# Altium PCB PCB1.PcbDoc
Units mil, origin at the board's own origin, x right, y up, seen from the top; angles counter-clockwise.
Board outline 1929.28 x 901.79 mil, 2 copper layers (Top Layer, Bottom Layer); 17 components, 17 nets, 58 pads, 16 vias.
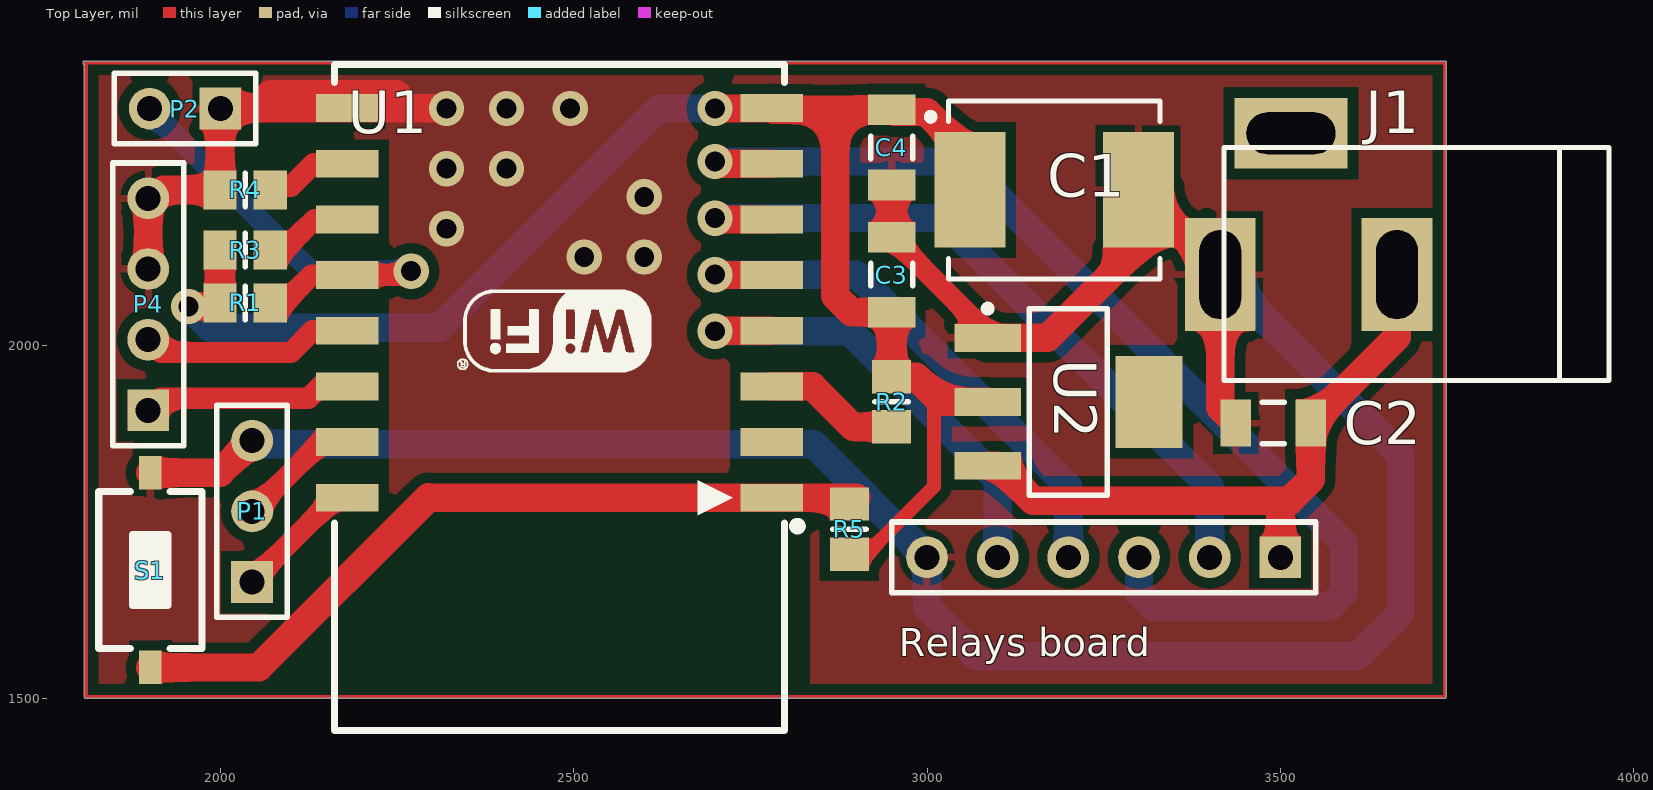
[diagram p0: Top Layer view]
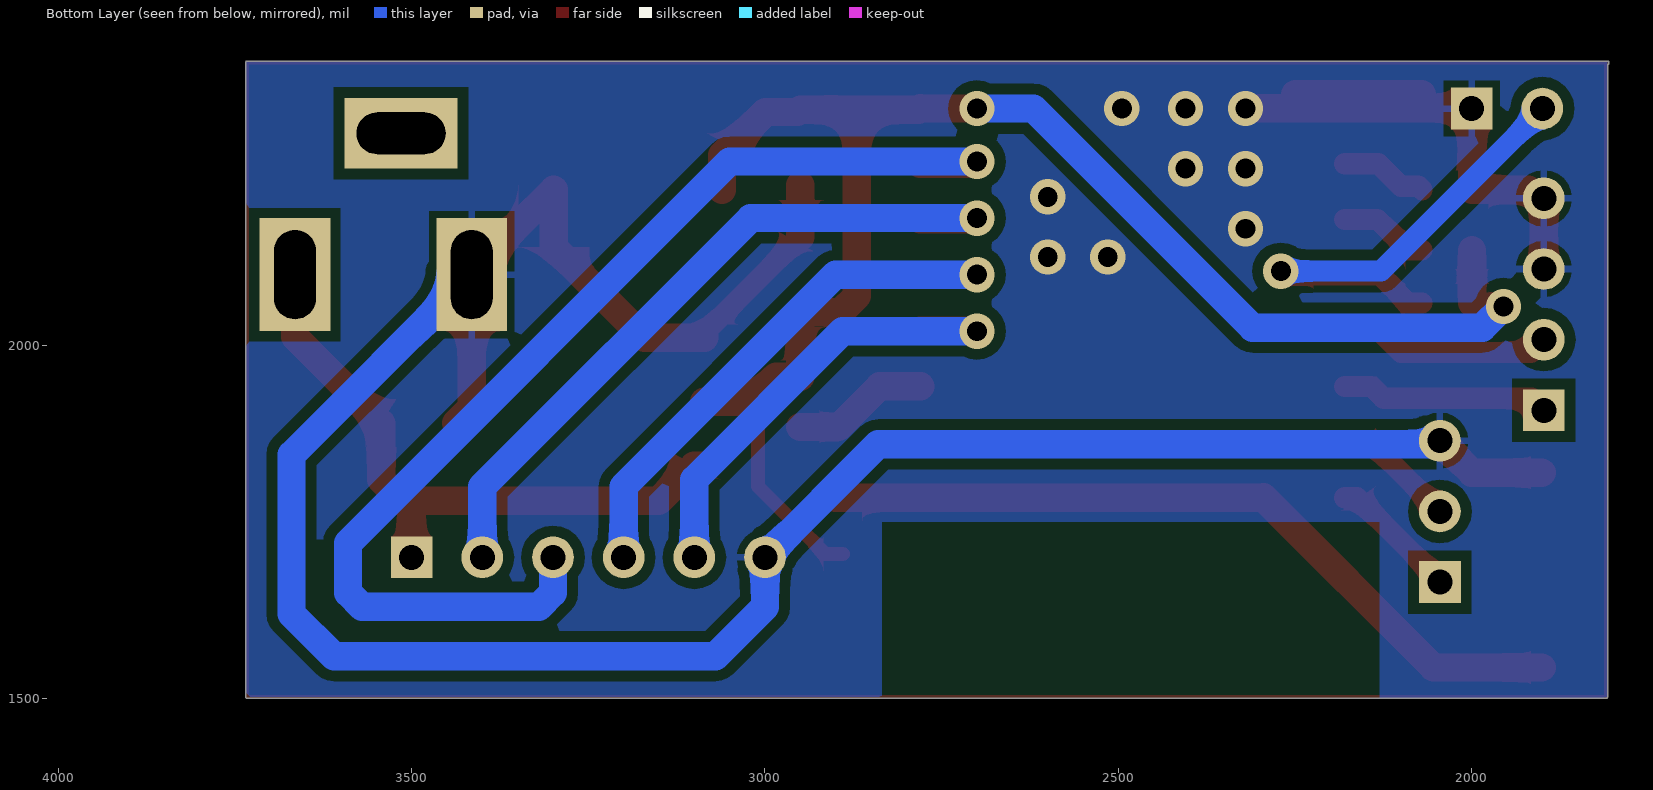
[diagram p1: Bottom Layer view, seen from below]

## Layer stack, top to bottom
Top Solder: solder mask 0.4, Solder Resist, Dk 3.5
Top Layer: signal copper 1.4
Dielectric 1: dielectric 12.6, FR-4, Dk 4.8
Bottom Layer: signal copper 1.4
Bottom Solder: solder mask 0.4, Solder Resist, Dk 3.5

## Board outline
1807.48,1503 1807.48,2397.36 cw(c1808.24,2399.76) 1808.24,2402.27 3732.5,2402.27 cw(c3732.5,2399.76) 3735.01,2399.76 3735.01,1503 cw(c3732.5,1503) 3732.5,1500.48 1810,1500.48 cw(c1810,1503)

## Design rules (kind name [scope] priority, off if disabled: settings)
Clearance [All] p1: gap=15
PolygonConnect [All] p1: connectstyle=Relief reliefconductorwidth=10 reliefentries=4 polygonreliefangle="90 Angle" airgapwidth=10
RoutingVias [All] p1: holewidth=28 width=50 viastyle="Through Hole" minholewidth=28 minwidth=50 maxholewidth=28 maxwidth=50
SolderMaskExpansion [All] p1: expansion=4
Width [All] p1: maxlimit=50 minlimit=1 preferedwidth=20
30 further rules are at their usual default settings.

## Classes and differential pairs
component class Schematic: C1 C2 C3 C4 J1 P1 P2 P4 R1 R2 R4 R5 "Relays board" S1 U1 U2

## Components (designator, comment, footprint, x,y, rotation, side; value= is the part's Value field where it differs from the comment)
C1 "T495E477K010ATE040" 7260-38 3180,2220 r0 top
C2 "Cap Semi" C1206 3490,1890 r0 top
C3 "Cap Semi" C1206 2950,2100 r270 top
C4 "Cap Semi" C1206 2950,2280 r90 top
J1 "PWR2.5" Jack-DC 3540,2200 r180 top
P1 "UART" HDR1X3 2045,1665 r90 top
P2 "flash" HDR1X2 2000,2335 r180 top
P4 "Header 4" HDR1X4 1898,1908 r90 top
R1 "Res1" 6-0805_N 2035,2060 r180 top
R2 "Res1" 6-0805_N 2950,1920 r90 top
R3 "Res1" 6-0805_N 2035,2135 r0 top
R4 "Res1" 6-0805_N 2035,2220 r0 top
R5 "Res1" 6-0805_N 2890,1740 r270 top
"Relays board" "Header 6" HDR1X6 3500,1700 r180 top (schematic designator P3)
S1 "SW-PB" SW-SMD 1901,1682 r270 top
U1 "ESP8266 ESP_7" "ESP8266 ESP_12" 2480,2060 r180 top
U2 "LM1117-3.3V" SOT223-4N 3200,1920 r0 top

## Footprints (in the part's own frame and the unit in brackets; to place one, negate y for a bottom-side part, rotate by r counter-clockwise, add the part's x,y. Pads: shape width x height; smd on the part's side, far side on the other; paste and mask are expansions set on the pad)
6-0805_N [mm] "Chip Resistor, Body 2.0x1.2mm, IPC Medium Density"
  rect 1.2x1.4 smd: 1(-0.9,0) 2(0.9,0)
  silkscreen extent 0,-0.6 0,0.6, body extent -1.07,-0.7 1.07,0.7, height 0.7
7260-38 [mm] "Medium density IPC, based on Kemet T495 series dimension data"
  rect 2.55x4.15 smd: 1(-3.025,0) 2(3.025,0)
  silkscreen extent -4.56,-3.2 3.8,3.2, body extent -3.8,-3.15 3.8,3.15, height 3.8
C1206 [mm] "Chip Capacitor, Body 3.2x1.6mm, IPC High Density"
  rect 1.1x1.7 smd: 1(-1.35,0) 2(1.35,0)
  silkscreen extent -0.4,-0.75 0.4,0.75, body extent -1.7,-0.9 1.7,0.9, height 1.3
"ESP8266 ESP_12" [mm] "ESP8266 ESP-12"
  rect 2.25x1 smd: 1(-7.625,7) 2(-7.625,5) 3(-7.625,3) 4(-7.625,1) 5(-7.625,-1) 6(-7.625,-3) 7(-7.625,-5) 8(-7.625,-7) 9(7.625,-7) 10(7.625,-5) 11(7.625,-3) 12(7.625,-1) 13(7.625,1) 14(7.625,3) 15(7.625,5) 16(7.625,7)
  silkscreen extent -8.7,-8.57 8.08,15.37, body extent -7.86,-8.52 8.16,15.51, height 3.82
HDR1X2 [mm] "Connector; Header; 2 Position"
  rect 1.5x1.5 hole 0.9: 1(0,0)
  round 1.5 hole 0.9: 2(2.54,0)
  silkscreen extent -1.27,-1.27 3.81,1.27
HDR1X3 [mm] "Connector; Header; 3 Position"
  rect 1.5x1.5 hole 0.9: 1(0,0)
  round 1.5 hole 0.9: 2(2.54,0) 3(5.08,0)
  silkscreen extent -1.27,-1.27 6.35,1.27
HDR1X4 [mm] "Connector; Header; 4 Position"
  rect 1.5x1.5 hole 0.9: 1(0,0)
  round 1.5 hole 0.9: 2(2.54,0) 3(5.08,0) 4(7.62,0)
  silkscreen extent -1.27,-1.27 8.89,1.27
HDR1X6 [mm] "Connector; Header; 6 Position"
  rect 1.5x1.5 hole 0.9: 1(0,0)
  round 1.5 hole 0.9: 2(2.54,0) 3(5.08,0) 4(7.62,0) 5(10.16,0) 6(12.7,0)
  silkscreen extent -1.27,-1.27 13.97,1.27
Jack-DC [mil] "Jack DC input"
  rect 100x160 hole 59.06 slot 125.98 at 90 deg: 1(125,100) 2(-125,100)
  rect 160x100 hole 59.06 slot 125.98 at 0 deg: 3(25,-100)
  silkscreen extent -425,-80 120,250, body extent -410,-105 134,269, height 434
SOT223-4N [mm] "SOT223, 4-Leads, Body 6.5x3.5mm, Pitch 2.3mm, Lead Span 7mm, IPC Medium Density"
  rect 2.4x1 smd: 1(-2.9,2.3) 2(-2.9,0) 3(-2.9,-2.3)
  rect 2.4x3.3 smd: 4(2.9,0)
  silkscreen extent -3.02,-3.35 1.4,3.47, body extent -3.39,-3.27 3.5,3.23, height 1.72
SW-SMD [mm] "Switch SMD type"
  rect 1.2x0.8 smd: 1(-3.5,0) 2(3.5,0)
  silkscreen extent -2.82,-1.85 2.82,1.85, body extent -3.05,-1.85 3.05,1.85, height 2.5

## Part data
C1: "CAP, TANT, 470uF, 10V, +/-10%, 0.04 ohm, 7260-38 SMD"
C2 C3 C4: "Capacitor (Semiconductor SIM Model)"
J1: "Low Voltage Power Supply Connector"
P1: library part "Header 3", "Header, 3-Pin"
P2: library part "Header 2", "Header, 2-Pin"
P4: "Header, 4-Pin"
R1 R2 R3 R4 R5: "Resistor"
"Relays board": "Header, 6-Pin"
S1: "Switch"
U1: library part "ESP8266 ESP_12", "ESP8266 ESP-12"
U2: library part LM1117, "800mA Low-Dropout Linear Regulator"

## Via types
v1: diameter 50, hole 28, Top Layer to Bottom Layer, 16 vias

## Nets (pads, with @x,y where several pads share a name; then routed paths per layer and width w, separated by ;. In a path a pad name is that pad's centre, name@x,y a point inside that pad or via, vN(x,y) a via of type N, cw(c..) or ccw(c..) an arc to the next point about the centre after c; other vN are vias at no path point)
3.3V: C1.1 C3.2 C4.2 R1.2 R2.2 R3.1 R5.2 U1.8 U2.2 | length 2323.6
  Top Layer w20: R5.2 2914.57,1704.57 3010,1800 3010,1910 3020,1920
  Top Layer w40: v1(1955,2055) 1994.57,2055 R1.2 R3.1 ; v1(2700,2335) 2779.61,2335 U1.8 2782.64,2333.15 2870,2333.15 ; C1.1 3060.91,2269.09 3000,2330 2953.15,2330 C4.2 2870,2333.15 ; U2.2 3020,1920 2984.57,1955.43 R2.2 C3.2 2893.15,2046.85 2870,2070 2870,2333.15
  Bottom Layer w40: v1(1955,2055) 1985,2025 2310,2025 2620,2335 v1(2700,2335)
5.0V: "Relays board.1" C2.2 J1.2 U2.3 | length 918
  Top Layer w40: U2.3 3100.55,1829.45 3150,1780 3513.15,1780 ; 3500,1700 3500,1770 3503.15,1770 3513.15,1780 ; J1.2 3665,2011.85 C2.2 3543.15,1810 3513.15,1780
FLASH: P2.2 R1.1 U1.12 | length 684.3
  Top Layer w30: R1.1 2090,2060 2129.37,2099.37 U1.12 2264.37,2099.37 v1(2270,2105)
  Bottom Layer w30: P2.2 1900,2333.52 2128.52,2105 v1(2270,2105)
GND: "Relays board.6" C1.2 C2.1 C3.1 C4.1 J1.1 P1.3 P2.1 P4.3 P4.4 R4.1 S1.1 U1.9 U2.1 | length 4394
  Top Layer w30: C3.1 U2.1@3085.83,2017.32
  Top Layer w40: P4.3 P4.4 1908,2208 1920,2220 R4.1 1999.57,2334.57 P2.1 2000.59,2335.59 U1.9 2319.41,2335.59 v1(2320,2335) ; S1.1 1999.8,1819.8 P1.3 ; 2070.59,2355.59 2249.8,2355.59 ; C3.1 C4.1 ; U2.1@3085.83,2017.32 U2.1 3170.55,2010.55 3299.09,2139.09 C1.2 3415,2104.09 J1.1 3415,1911.85 C2.1
  Bottom Layer w40: P1.3 2050,1860 2840,1860 3000,1700 3000,1630 3070,1560 3610,1560 3670,1620 3670,1845 J1.1
  other v1: 2515,2125 2600,2125 2320,2165 2600,2210 2320,2250 2405,2250 2405,2335 2495,2335
GPIO4: P4.2 U1.13 | length 301.9
  Top Layer w30: P4.2 1916,1990 2100,1990 2130.63,2020.63 U1.13
GPIO5: P4.1 U1.14 | length 295.8
  Top Layer w30: P4.1 1915,1925 2125,1925 2141.89,1941.89 U1.14
GPIO12: "Relays board.2" U1.6 | length 1038.4
  Top Layer w40: v1(2700,2180) 2701.89,2178.11 U1.6
  Bottom Layer w40: v1(2700,2180) 3020,2180 3400,1800 3400,1700
GPIO13: "Relays board.3" U1.7 | length 1621.7
  Top Layer w40: v1(2700,2260) 2703.15,2256.85 U1.7
  Bottom Layer w40: v1(2700,2260) 3050,2260 3590,1720 3590,1650 3570,1630 3320,1630 3300,1650 3300,1700
GPIO14: "Relays board.4" U1.5 | length 803.8
  Top Layer w40: v1@2700.63,2099.37 U1.5
  Bottom Layer w40: v1(2700,2100) 2900,2100 3200,1800 3200,1700
GPIO16: "Relays board.5" U1.4 | length 676.6
  Top Layer w40: v1@2700.63,2020.63 U1.4
  Bottom Layer w40: v1(2700,2020) 2890,2020 3100,1810 3100,1700
NetJ1_3: J1.3
NetP1_1: P1.1 U1.16 | length 185.5
  Top Layer w30: P1.1 2045,1667.16 2162.25,1784.41 U1.16
NetP1_2: P1.2 U1.15 | length 175.5
  Top Layer w30: P1.2 2143.15,1863.15 U1.15
NetR2_1: R2.1 U1.3 | length 193.5
  Top Layer w40: U1.3 2838.11,1941.89 2895.43,1884.57 R2.1
NetR3_2: R3.2 U1.11 | length 127.2
  Top Layer w30: R3.2 2090,2135 2133.11,2178.11 U1.11
NetR4_2: R4.2 U1.10 | length 124.6
  Top Layer w30: R4.2 2075.43,2225 2100,2225 2131.85,2256.85 U1.10
RST: R5.1 S1.2 U1.1 | length 1099.1
  Top Layer w40: S1.2 2054.2,1544.2 2295,1785 2295.59,1784.41 U1.1 2899.84,1784.41 R5.1@2900,1784.57
pads on no net: U1.2 U2.4
copper on no net: | length 5639.5
  Top Layer w5: 1808.24,2399.76 3732.5,2399.76 3732.5,2012.75 3732.5,1503 1810,1503 1810,2399

## Polygon pours and split planes (outlines as drawn)
GND on Top Layer "Top Layer-No Net" (solid, remove dead copper, pour order 4): 1810,2399 1813.48,2402.48 3732.5,2402.48 3732.5,1503 3734.43,1501.07 3732.5,1503 2835,1503 2835,1745 2840,1750 2165,1750 2127.84,1750 2125,1747.16 2125,1503 1807.48,1503 1808.24,1503.76 1808.24,2399.76
GND on Bottom Layer "Top Layer-No Net" (solid, remove dead copper, pour order 6): 1808.24,2402.27 3733.84,2402.27 3734.43,2401.68 3735.22,2400.89 3735.22,1503 2838,1503 2835,1500 2835,1750 2130,1750 2130,1500 1809.82,1500 1807.78,1502.04 1808.24,1502.5 1808.24,2402.27

## Silkscreen, mask and mechanical layers (free items; w line width, h text height)
Mechanical 1:
  lines w47.24: 1790.46,1505.47 ccw(c1795.47,1505.47) 1795.47,1500.46 3735.47,1500.46 ccw(c3735.47,1505.47) 3740.49,1505.47 3740.49,2394.53 ccw(c3735.47,2394.53) 3735.47,2399.54 1805.47,2399.54 ccw(c1805.47,2394.53) 1800.49,2395.08 1800.49,2395.47 ccw(c1795.47,2395.47) 1790.46,2395.47 1790.46,1505.47

## Text inside footprints (layer, text, board x,y; h text height)
U1: Mechanical 13 "ANTENNA AREA" at 2789.96,1474.41 h10 r180; Mechanical 13 "CUTOUT POLYGON" at 2789.96,1494.41 h10 r180